# EAGLE board sensor_node_top_layer-Panel (EAGLE 9.2.0)
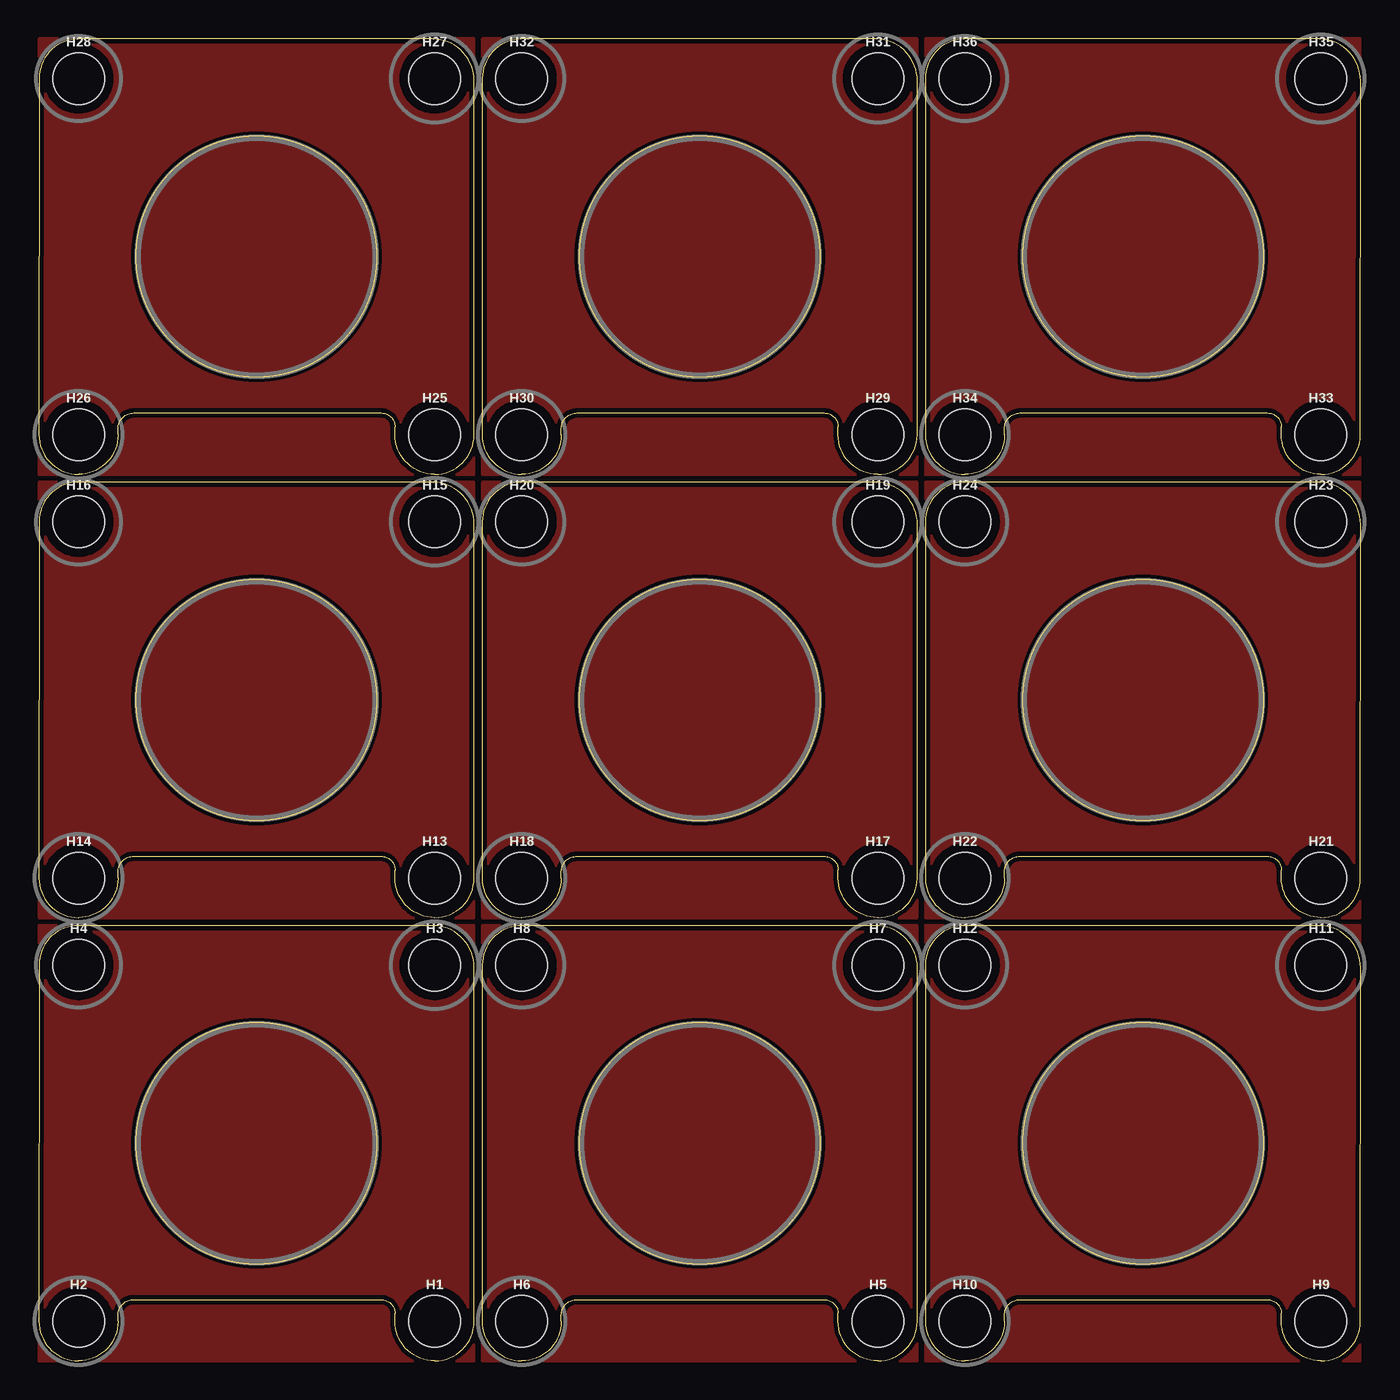
[diagram p0: board, top side]
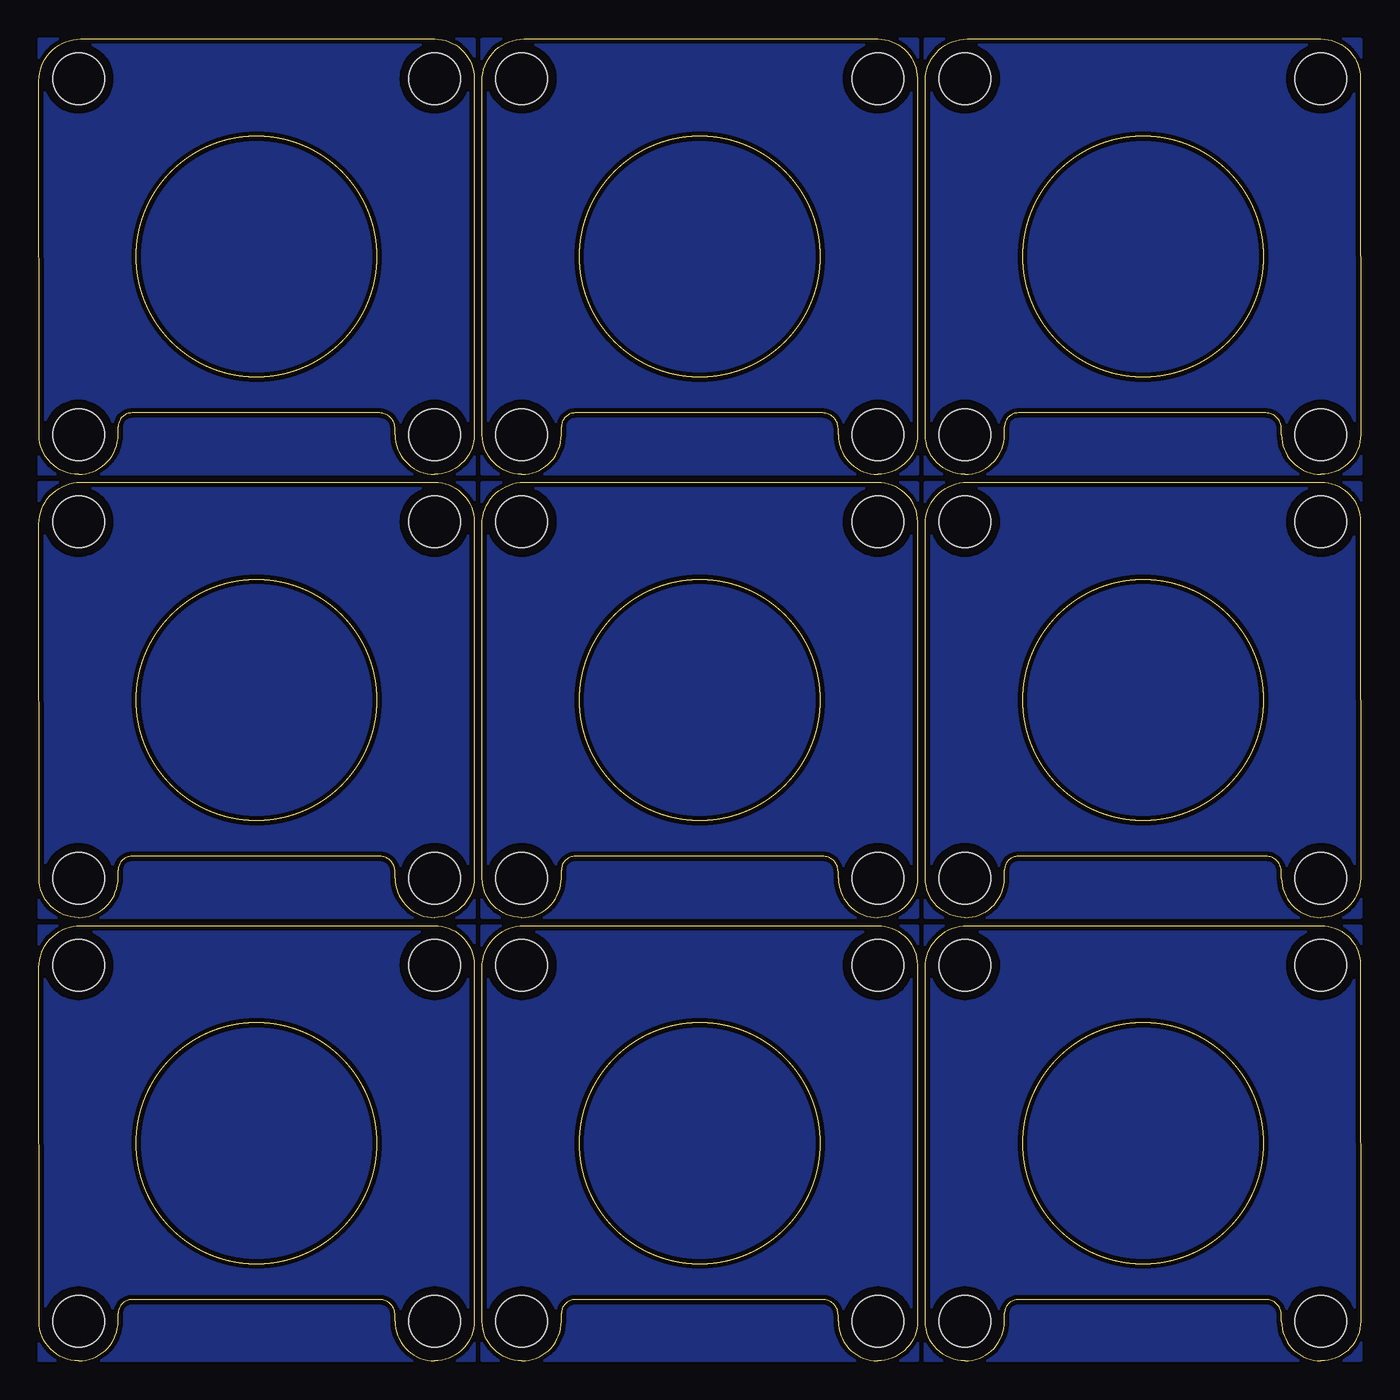
[diagram p1: board, bottom side, seen from below]

Size 84.85 x 84.84 mm. Coordinates in mm from the lower left corner, seen from the top.
Outline: 0.01,25.41 0,2.54 arc90 2.54,0 arc90 5.08,2.54 5.08,2.94 arc-90 6.07,3.94 8.38,3.94 19.18,3.94 21.97,3.94 arc-90 22.86,3.05 22.86,2.54 arc90 25.4,0 arc90 27.94,2.53 27.94,25.25 arc90 25.26,27.94 2.54,27.94 arc90 0.01,25.41
Outline: 28.46,25.41 28.45,2.54 arc90 30.99,0 arc90 33.53,2.54 33.53,2.94 arc-90 34.53,3.94 36.83,3.94 47.63,3.94 50.42,3.94 arc-90 51.31,3.05 51.31,2.54 arc90 53.85,0 arc90 56.39,2.53 56.4,25.25 arc90 53.71,27.94 30.99,27.94 arc90 28.46,25.41
Outline: 56.91,25.41 56.91,2.54 arc90 59.45,0 arc90 61.99,2.54 61.99,2.94 arc-90 62.98,3.94 65.29,3.94 76.08,3.94 78.88,3.94 arc-90 79.77,3.05 79.77,2.54 arc90 82.31,0 arc90 84.84,2.53 84.85,25.25 arc90 82.16,27.94 59.45,27.94 arc90 56.91,25.41
Outline: 0.01,53.86 0,30.99 arc90 2.54,28.45 arc90 5.08,30.99 5.08,31.39 arc-90 6.07,32.39 8.38,32.39 19.18,32.39 21.97,32.39 arc-90 22.86,31.5 22.86,30.99 arc90 25.4,28.45 arc90 27.94,30.98 27.94,53.7 arc90 25.26,56.39 2.54,56.39 arc90 0.01,53.86
Outline: 28.46,53.86 28.45,30.99 arc90 30.99,28.45 arc90 33.53,30.99 33.53,31.39 arc-90 34.53,32.39 36.83,32.39 47.63,32.39 50.42,32.39 arc-90 51.31,31.5 51.31,30.99 arc90 53.85,28.45 arc90 56.39,30.98 56.4,53.7 arc90 53.71,56.39 30.99,56.39 arc90 28.46,53.86
Outline: 56.91,53.86 56.91,30.99 arc90 59.45,28.45 arc90 61.99,30.99 61.99,31.39 arc-90 62.98,32.39 65.29,32.39 76.08,32.39 78.88,32.39 arc-90 79.77,31.5 79.77,30.99 arc90 82.31,28.45 arc90 84.84,30.98 84.85,53.7 arc90 82.16,56.39 59.45,56.39 arc90 56.91,53.86
Outline: 0.01,82.31 0,59.44 arc90 2.54,56.9 arc90 5.08,59.44 5.08,59.84 arc-90 6.07,60.84 8.38,60.84 19.18,60.84 21.97,60.84 arc-90 22.86,59.95 22.86,59.44 arc90 25.4,56.9 arc90 27.94,59.43 27.94,82.15 arc90 25.26,84.84 2.54,84.84 arc90 0.01,82.31
Outline: 28.46,82.31 28.45,59.44 arc90 30.99,56.9 arc90 33.53,59.44 33.53,59.84 arc-90 34.53,60.84 36.83,60.84 47.63,60.84 50.42,60.84 arc-90 51.31,59.95 51.31,59.44 arc90 53.85,56.9 arc90 56.39,59.43 56.4,82.15 arc90 53.71,84.84 30.99,84.84 arc90 28.46,82.31
Outline: 56.91,82.31 56.91,59.44 arc90 59.45,56.9 arc90 61.99,59.44 61.99,59.84 arc-90 62.98,60.84 65.29,60.84 76.08,60.84 78.88,60.84 arc-90 79.77,59.95 79.77,59.44 arc90 82.31,56.9 arc90 84.84,59.43 84.85,82.15 arc90 82.16,84.84 59.45,84.84 arc90 56.91,82.31
Outline: circle at 13.97,13.97 radius 7.73
Outline: circle at 42.42,13.97 radius 7.73
Outline: circle at 70.88,13.97 radius 7.73
Outline: circle at 13.97,42.42 radius 7.73
Outline: circle at 42.42,42.42 radius 7.73
Outline: circle at 70.88,42.42 radius 7.73
Outline: circle at 13.97,70.87 radius 7.73
Outline: circle at 42.42,70.87 radius 7.73
Outline: circle at 70.88,70.87 radius 7.73
Copper layers (1*16): Top 0.035mm / dielectric 1.5mm / Bottom 0.035mm
Design rules "SparkFun-2-layer-PCBWay-LIMIT": minimum track width 6mil, minimum drill 0.3mm, track to track 6mil, track to pad 6mil, pad to pad 6mil, via to via 6mil, smd to smd 6mil, copper to edge 6mil, drill to drill 6mil, minimum pad ring 6mil, minimum via ring 6mil, stop-mask expansion 4mil, vias tented up to drill 25mil, thermal gap 10mil

## Footprints (pad centres in the part's own frame; a part is rotated, then mirrored left to right if it is on the bottom)
STAND-OFF = hole 3.302: 0,0

## Placement (x,y rotation side)
H1  STAND-OFF  [STAND-OFF]  25.4,2.54 0 top
H2  STAND-OFF  [STAND-OFF]  2.54,2.54 0 top
H3  STAND-OFF  [STAND-OFF]  25.4,25.4 0 top
H4  STAND-OFF  [STAND-OFF]  2.54,25.4 0 top
H5  STAND-OFF  [STAND-OFF]  53.85,2.54 0 top
H6  STAND-OFF  [STAND-OFF]  30.99,2.54 0 top
H7  STAND-OFF  [STAND-OFF]  53.85,25.4 0 top
H8  STAND-OFF  [STAND-OFF]  30.99,25.4 0 top
H9  STAND-OFF  [STAND-OFF]  82.31,2.54 0 top
H10  STAND-OFF  [STAND-OFF]  59.45,2.54 0 top
H11  STAND-OFF  [STAND-OFF]  82.31,25.4 0 top
H12  STAND-OFF  [STAND-OFF]  59.45,25.4 0 top
H13  STAND-OFF  [STAND-OFF]  25.4,30.99 0 top
H14  STAND-OFF  [STAND-OFF]  2.54,30.99 0 top
H15  STAND-OFF  [STAND-OFF]  25.4,53.85 0 top
H16  STAND-OFF  [STAND-OFF]  2.54,53.85 0 top
H17  STAND-OFF  [STAND-OFF]  53.85,30.99 0 top
H18  STAND-OFF  [STAND-OFF]  30.99,30.99 0 top
H19  STAND-OFF  [STAND-OFF]  53.85,53.85 0 top
H20  STAND-OFF  [STAND-OFF]  30.99,53.85 0 top
H21  STAND-OFF  [STAND-OFF]  82.31,30.99 0 top
H22  STAND-OFF  [STAND-OFF]  59.45,30.99 0 top
H23  STAND-OFF  [STAND-OFF]  82.31,53.85 0 top
H24  STAND-OFF  [STAND-OFF]  59.45,53.85 0 top
H25  STAND-OFF  [STAND-OFF]  25.4,59.44 0 top
H26  STAND-OFF  [STAND-OFF]  2.54,59.44 0 top
H27  STAND-OFF  [STAND-OFF]  25.4,82.3 0 top
H28  STAND-OFF  [STAND-OFF]  2.54,82.3 0 top
H29  STAND-OFF  [STAND-OFF]  53.85,59.44 0 top
H30  STAND-OFF  [STAND-OFF]  30.99,59.44 0 top
H31  STAND-OFF  [STAND-OFF]  53.85,82.3 0 top
H32  STAND-OFF  [STAND-OFF]  30.99,82.3 0 top
H33  STAND-OFF  [STAND-OFF]  82.31,59.44 0 top
H34  STAND-OFF  [STAND-OFF]  59.45,59.44 0 top
H35  STAND-OFF  [STAND-OFF]  82.31,82.3 0 top
H36  STAND-OFF  [STAND-OFF]  59.45,82.3 0 top

## Library data of the parts
H1-H36 = SparkFun-Hardware

## Tracks (layer width: path | path; a pad name or v marks a point on that pad's centre or on a via)
GND
  pour Top (isolate 0.305): 0,27.94 0,0 27.94,0 27.94,27.94
  pour Bottom (isolate 0.305): 0,27.94 0,0 27.94,0 27.94,27.94
GND1
  pour Top (isolate 0.305): 28.45,27.94 28.45,0 56.39,0 56.39,27.94
  pour Bottom (isolate 0.305): 28.45,27.94 28.45,0 56.39,0 56.39,27.94
GND2
  pour Top (isolate 0.305): 56.91,27.94 56.91,0 84.85,0 84.85,27.94
  pour Bottom (isolate 0.305): 56.91,27.94 56.91,0 84.85,0 84.85,27.94
GND3
  pour Top (isolate 0.305): 0,56.39 0,28.45 27.94,28.45 27.94,56.39
  pour Bottom (isolate 0.305): 0,56.39 0,28.45 27.94,28.45 27.94,56.39
GND4
  pour Top (isolate 0.305): 28.45,56.39 28.45,28.45 56.39,28.45 56.39,56.39
  pour Bottom (isolate 0.305): 28.45,56.39 28.45,28.45 56.39,28.45 56.39,56.39
GND5
  pour Top (isolate 0.305): 56.91,56.39 56.91,28.45 84.85,28.45 84.85,56.39
  pour Bottom (isolate 0.305): 56.91,56.39 56.91,28.45 84.85,28.45 84.85,56.39
GND6
  pour Top (isolate 0.305): 0,84.84 0,56.9 27.94,56.9 27.94,84.84
  pour Bottom (isolate 0.305): 0,84.84 0,56.9 27.94,56.9 27.94,84.84
GND7
  pour Top (isolate 0.305): 28.45,84.84 28.45,56.9 56.39,56.9 56.39,84.84
  pour Bottom (isolate 0.305): 28.45,84.84 28.45,56.9 56.39,56.9 56.39,84.84
GND8
  pour Top (isolate 0.305): 56.91,84.84 56.91,56.9 84.85,56.9 84.85,84.84
  pour Bottom (isolate 0.305): 56.91,84.84 56.91,56.9 84.85,56.9 84.85,84.84